# Altium PCB PCB2.PcbDoc
Units mm, origin at the board's own origin, x right, y up, seen from the top; angles counter-clockwise.
Board outline 100 x 50 mm, 2 copper layers (Top Layer, Bottom Layer); 30 components, 21 nets, 98 pads, 11 vias.
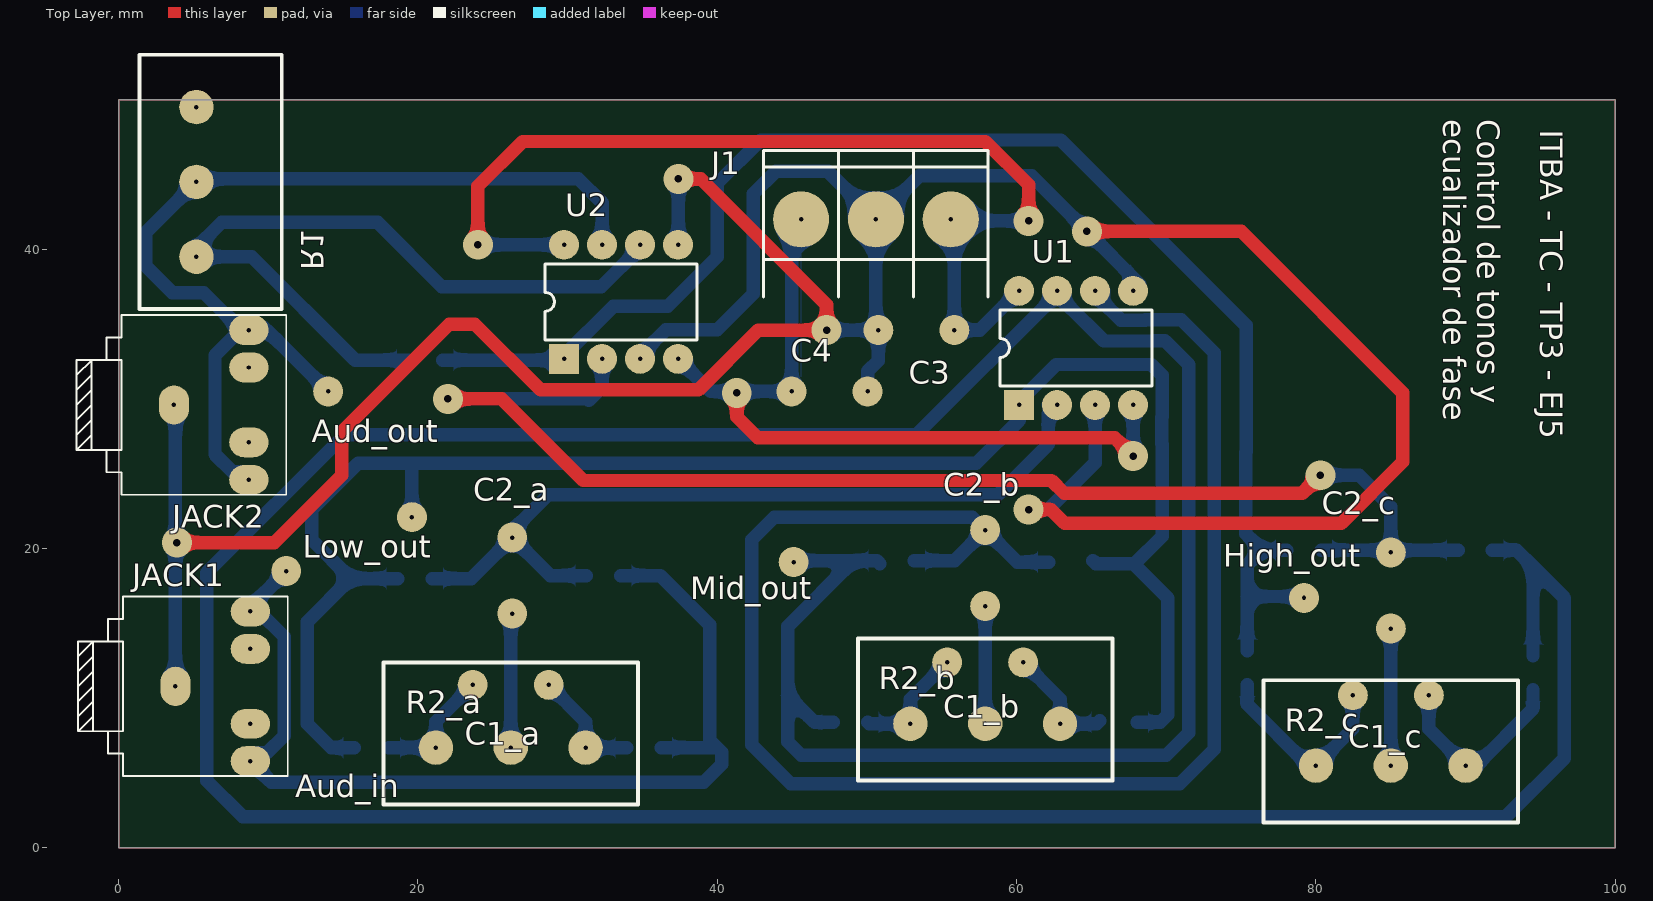
[diagram p0: Top Layer view]
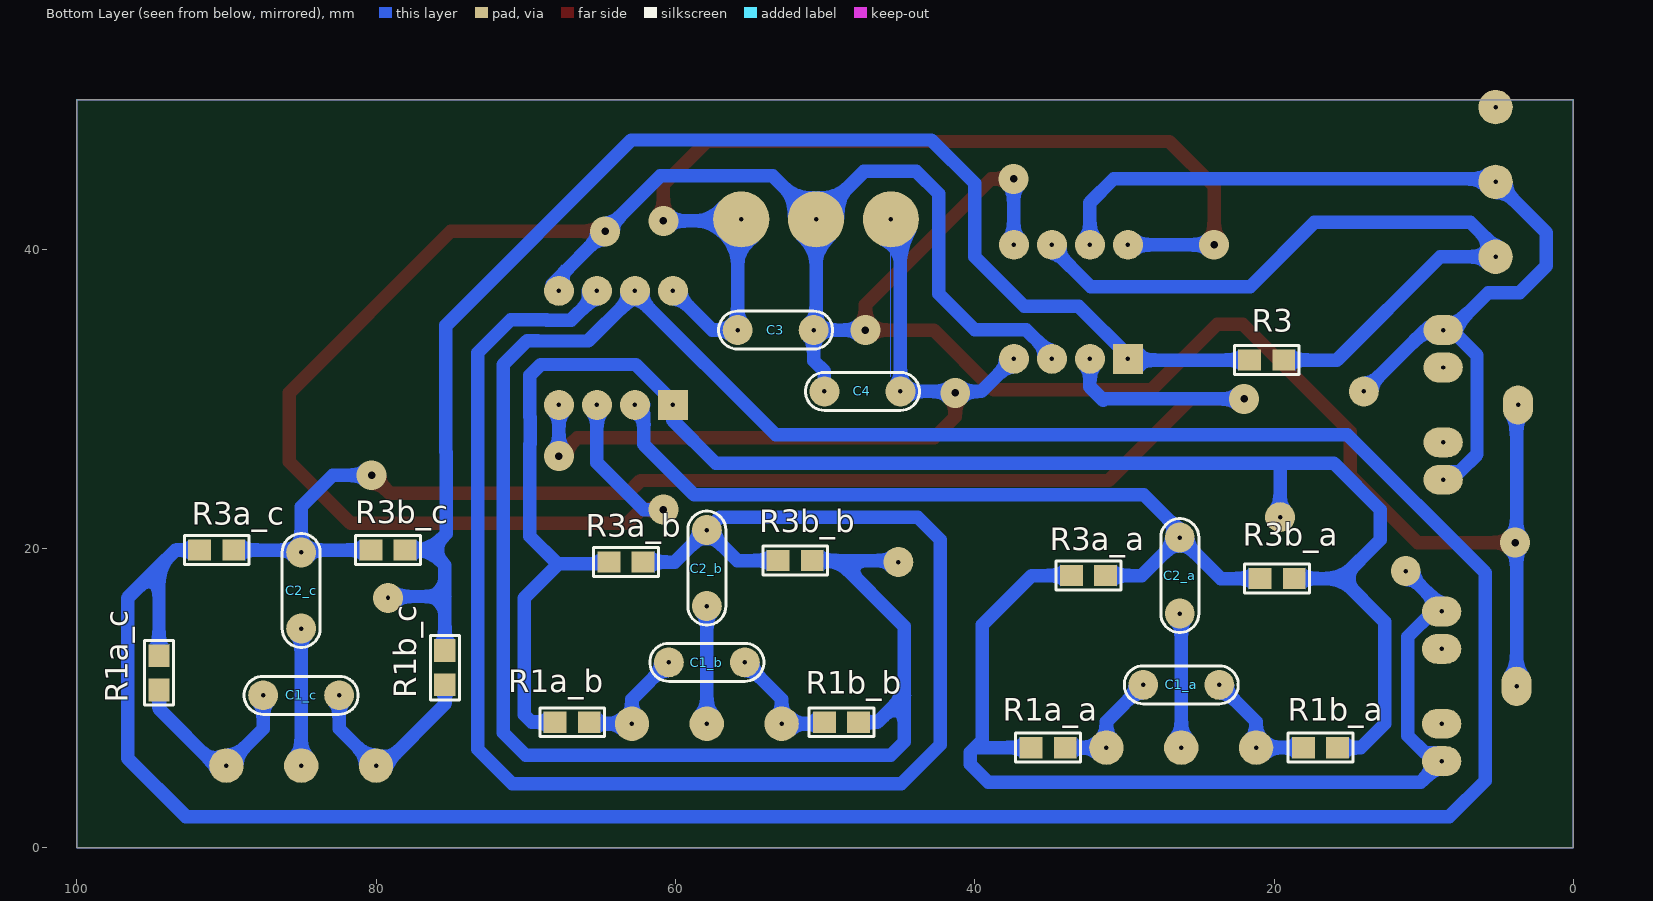
[diagram p1: Bottom Layer view, seen from below]
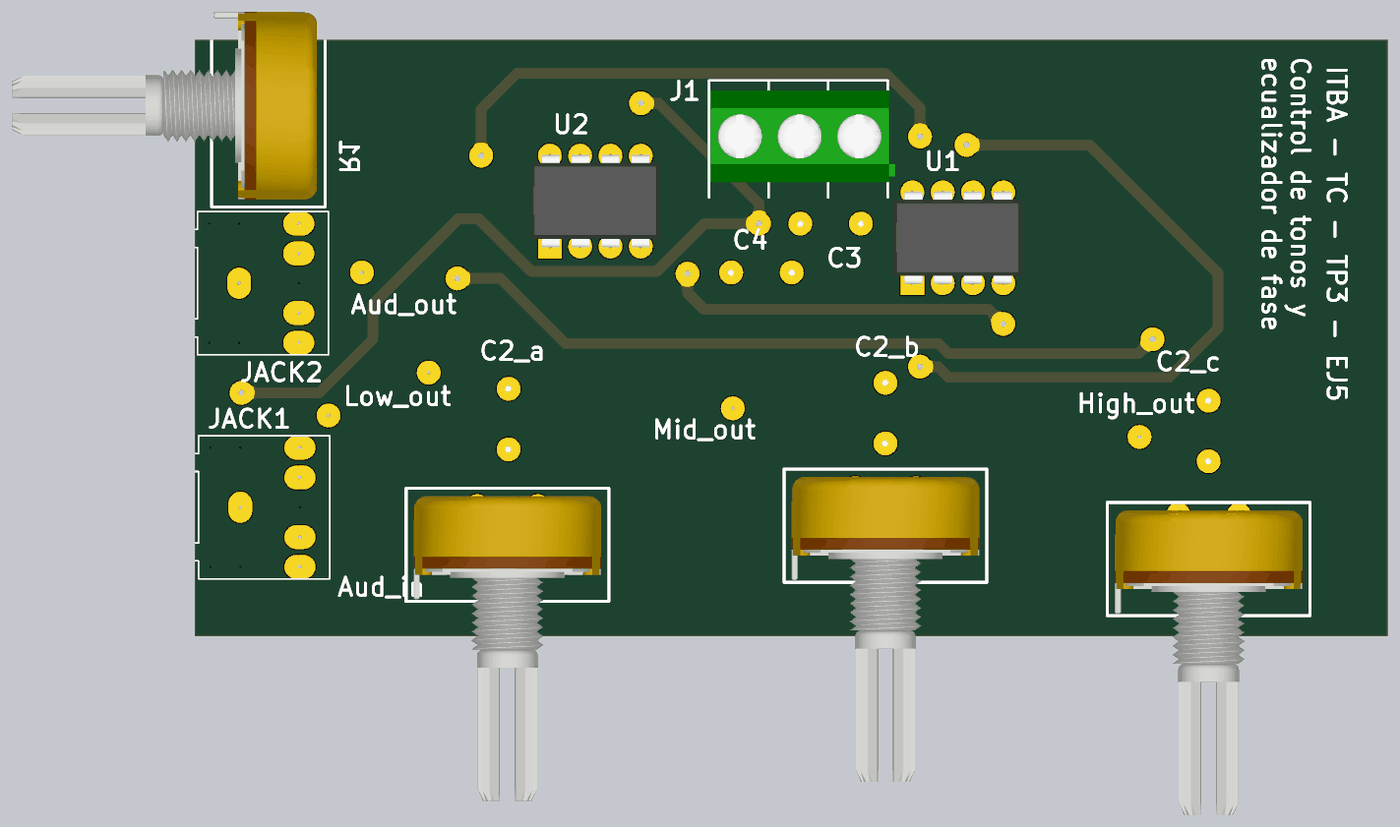
[diagram p2: 3D render of the assembled board from above, using the file's embedded part models]
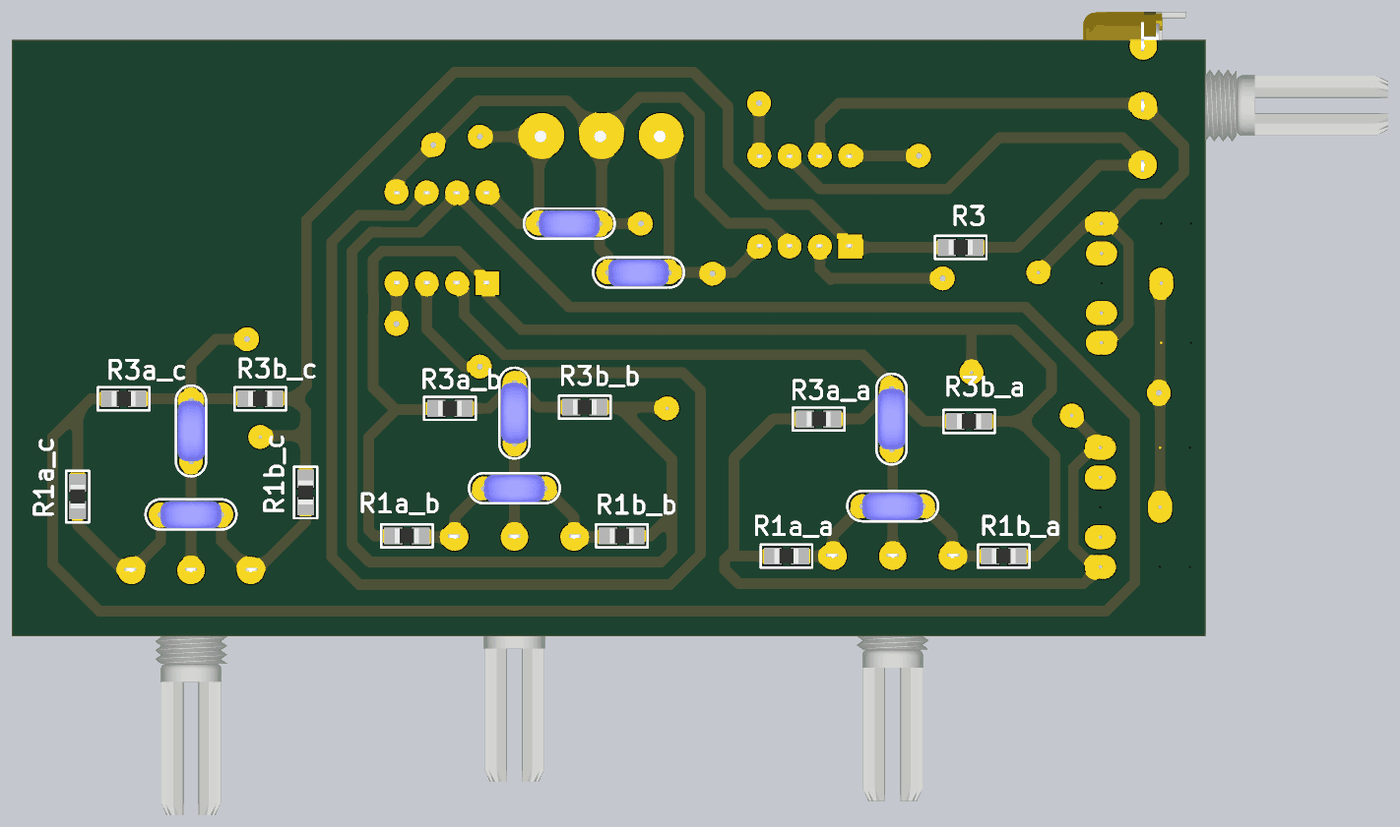
[diagram p3: 3D render of the assembled board from below, using the file's embedded part models]

## Layer stack, top to bottom
Top Solder: solder mask 0.0102, Solder Resist, Dk 3.5
Top Layer: signal copper 0.0356
Dielectric 1: dielectric 0.32, FR-4, Dk 4.8
Bottom Layer: signal copper 0.0356
Bottom Solder: solder mask 0.0102, Solder Resist, Dk 3.5

## Board outline
0,0 100,0 100,50 0,50

## Design rules (kind name [scope] priority, off if disabled: settings)
Clearance [All] p1: gap=0.5 ignorepadtopadclearanceinfootprint=FALSE
PolygonConnect PolygonConnect_5 [All vs IsNamedPolygon('GND_L02_P010')] p1: thpad.connectstyle=Relief thpad.reliefconductorwidth=0.5 thpad.reliefentries=4 thpad.polygonreliefangle="45 Angle" thpad.airgapwidth=0.254 smdpad.connectstyle=Relief smdpad.reliefconductorwidth=0.5 smdpad.reliefentries=4 smdpad.polygonreliefangle="45 Angle" smdpad.airgapwidth=0.254 via.connectstyle=Relief via.reliefconductorwidth=0.254 via.reliefentries=4 via.polygonreliefangle="90 Angle" via.airgapwidth=0.254
PolygonConnect Cond_width_mine [All vs IsNamedPolygon('GND_L02_P010')] p2: thpad.connectstyle=Relief thpad.reliefconductorwidth=0.5 thpad.reliefentries=4 thpad.polygonreliefangle="90 Angle" thpad.airgapwidth=0.254 smdpad.connectstyle=Relief smdpad.reliefconductorwidth=0.5 smdpad.reliefentries=4 smdpad.polygonreliefangle="90 Angle" smdpad.airgapwidth=0.254 via.connectstyle=Relief via.reliefconductorwidth=0.254 via.reliefentries=4 via.polygonreliefangle="90 Angle" via.airgapwidth=0.254
PolygonConnect PolygonConnect_4 [All vs IsNamedPolygon('GND_L02_P010')] p3: connectstyle=Relief reliefconductorwidth=0.5 reliefentries=4 polygonreliefangle="90 Angle" airgapwidth=0.254
PolygonConnect PolygonConnect_3 [All vs IsNamedPolygon('GND_L02_P010')] p4: thpad.connectstyle=Relief thpad.reliefconductorwidth=0.5 thpad.reliefentries=4 thpad.polygonreliefangle="90 Angle" thpad.airgapwidth=0.254 smdpad.connectstyle=Relief smdpad.reliefconductorwidth=0.254 smdpad.reliefentries=4 smdpad.polygonreliefangle="90 Angle" smdpad.airgapwidth=0.254 via.connectstyle=Relief via.reliefconductorwidth=0.254 via.reliefentries=4 via.polygonreliefangle="90 Angle" via.airgapwidth=0.254
PolygonConnect PolygonConnect_2 [All vs IsNamedPolygon('GND_L02_P010')] p5: thpad.connectstyle=Relief thpad.reliefconductorwidth=0.5 thpad.reliefentries=4 thpad.polygonreliefangle="90 Angle" thpad.airgapwidth=0.254 smdpad.connectstyle=Relief smdpad.reliefconductorwidth=0.5 smdpad.reliefentries=4 smdpad.polygonreliefangle="90 Angle" smdpad.airgapwidth=0.254 via.connectstyle=Relief via.reliefconductorwidth=0.254 via.reliefentries=4 via.polygonreliefangle="90 Angle" via.airgapwidth=0.254
PolygonConnect PolygonConnect_1 [All vs IsNamedPolygon('GND_L02_P010')] p6: thpad.connectstyle=Relief thpad.reliefconductorwidth=0.5 thpad.reliefentries=4 thpad.polygonreliefangle="90 Angle" thpad.airgapwidth=0.254 smdpad.connectstyle=Relief smdpad.reliefconductorwidth=0.254 smdpad.reliefentries=4 smdpad.polygonreliefangle="90 Angle" smdpad.airgapwidth=0.254 via.connectstyle=Relief via.reliefconductorwidth=0.254 via.reliefentries=4 via.polygonreliefangle="90 Angle" via.airgapwidth=0.254
PolygonConnect [All] p7: connectstyle=Relief reliefconductorwidth=0.254 reliefentries=4 polygonreliefangle="90 Angle" airgapwidth=0.254
RoutingVias [All] p1: holewidth=0.5 width=2 viastyle="Through Hole" minholewidth=0.3 minwidth=1.5 maxholewidth=0.5 maxwidth=2
SolderMaskExpansion [All] p1: expansion=0.102
Width [All] p1: maxlimit=0.9 minlimit=0.6 preferedwidth=0.9
30 further rules are at their usual default settings.

## Classes and differential pairs
component class U_EQ_C: C1_c C2_c R1a_c R1b_c R2_c R3a_c R3b_c U2
component class U_EQ_B: C1_b R1a_b R1b_b R3a_b R3b_b
component class U_EQ_A: C1_a C2_a R1a_a R1b_a R2_a R3a_a R3b_a U1
component class Top: C3 C4 JACK1 JACK2 R1 R3

## Components (designator, comment, footprint, x,y, rotation, side; value= is the part's Value field where it differs from the comment)
C1_a "47nF" CAP200 26.2,10.9 r180 bottom
C1_b "470nF" CAP200 57.9,12.4 r180 bottom
C1_c "56nF" CAP200 85,10.2 r180 bottom
C2_a "470nF" CAP200 26.3,18.2 r90 bottom
C2_b "47nF" CAP200 57.9,18.7 r90 bottom
C2_c "5.6nF" CAP200 85,17.2 r90 bottom
C3 "100nF" CAP200 53.3,34.6 r180 bottom
C4 "100nF" CAP200 47.5,30.5 r180 bottom
J1 "BORNERA 3" BORNERA3 50.6,42 r270 top
JACK1 "FC68131" *FC68131-5P 8.8,10.8 r0 top
JACK2 "FC68131" *FC68131-5P 8.7,29.6 r0 top
R1 "1K" POTENCIOMETRO 5.2,44.5 r90 top
R1a_a "120R" 0805 35.1,6.7 r180 bottom
R1a_b "120R" 0805 66.9,8.4 r180 bottom
R1a_c "150R" 0805 94.5,11.7 r270 bottom
R1b_a "120R" 0805 16.9,6.7 r180 bottom
R1b_b "120R" 0805 48.9,8.4 r180 bottom
R1b_c "150R" 0805 75.4,12.043 r90 bottom
R2_a "100K" POTENCIOMETRO 26.2,6.7 r0 top
R2_b "1K" POTENCIOMETRO 57.9,8.3 r0 top
R2_c "1K" POTENCIOMETRO 85,5.5 r0 top
R3 "470R" 0805 20.5,32.6 r180 bottom
R3a_a "1M" 0805 32.4,18.2 r180 bottom
R3a_b "10K" 0805 63.3,19.1 r180 bottom
R3a_c "10K" 0805 90.643,19.9 r180 bottom
R3b_a "1M" 0805 19.8,18 r180 bottom
R3b_b "10K" 0805 52,19.2 r180 bottom
R3b_c "10K" 0805 79.2,19.9 r180 bottom
U1 "LM833" DIP8 60.16,29.6 r90 top
U2 "LM833" DIP8 29.76,32.68 r90 top

## Footprints (in the part's own frame and the unit in brackets; to place one, negate y for a bottom-side part, rotate by r counter-clockwise, add the part's x,y. Pads: shape width x height; smd on the part's side, far side on the other; paste and mask are expansions set on the pad)
0805 [mil] "Pasivo 0805"
  rect 60x56 smd: 1(-45,0) 2(45,0)
  silkscreen extent -85,-38 85,38, body extent -40,-25 39,25, height 15
*FC68131-5P [mm]
  oval 2x2.616 hole 0.3: 1(-5,0)
  oval 2.616x2 hole 0.3: 2(0,-5) 3(0,-2.5) 4(0,2.5) 5(0,5)
  round 0 all layers, no hole: None(-7.5,-5) None(-7.5,5) None(-5,-5) None(-5,5) None(0,0)
  silkscreen extent -11.5,-6 2.5,6
BORNERA3 [mm] "Bornera con Tornillos 5mm separación"
  round 3.75 hole 0.3: 1(0,5) 2(0,0) 3(0,-5)
  silkscreen extent -4.6,-7.5 5.2,7.5, body extent -3.76,-7.39 3.94,8.11, height 10.05
CAP200 [mm]
  round 2 hole 0.3: 1(-2.54,0) 2(2.54,0)
  silkscreen extent -3.81,-1.27 3.81,1.27, body extent -2.79,-1.17 2.79,1.12, height 6.24
DIP8 [mm]
  rect 2x2 hole 0.3: 1(0,0)
  round 2 hole 0.3: 2(0,-2.54) 3(0,-5.08) 4(0,-7.62) 5(7.62,-7.62) 6(7.62,-5.08) 7(7.62,-2.54) 8(7.62,0)
  silkscreen extent 1.27,-8.89 6.35,1.27, body extent -0.06,-9.21 7.7,1.59, height 4.5
POTENCIOMETRO [mm]
  round 2.3 hole 0.3: 1(-5,0) 2(0,0) 3(5,0)
  silkscreen extent -8.5,-5.7 8.5,3.8, body extent -7.87,-5.03 7.87,20.53, height 20.14

## Part data
C1_a C1_b C1_c C2_a C2_b C2_c C3 C4: library part CAP
JACK1 JACK2: "Stereo Jack, 3.5mm, 3pos, Pcb", Package=None, Availability=Unavailable, MF=Cliff, MP=FC68131, Price=None, SnapEDA_Link=https://www.snapeda.com/parts/FC68131/Cliff%20Electronics/view-part/?ref=snap
R1 R2_a R2_b R2_c: library part POTENCIOMETRO
R1a_a R1a_b R1a_c R1b_a R1b_b R1b_c R3 R3a_a R3a_b R3a_c R3b_a R3b_b R3b_c: library part RES
U1 U2: "Dual Audio Operational Amplifier"

## Free pads (board coordinates)
  round 2 hole 0.3: 2(14,30.5) 3(11.2,18.5) 4(19.6,22.1) 5(45.1,19.1) 6(79.2,16.7)

## Via types
v1: diameter 2, hole 0.5, Top Layer to Bottom Layer, 11 vias

## Nets (pads, with @x,y where several pads share a name; then routed paths per layer and width w, separated by ;. In a path a pad name is that pad's centre, name@x,y a point inside that pad or via, vN(x,y) a via of type N, cw(c..) or ccw(c..) an arc to the next point about the centre after c; other vN are vias at no path point)
+Vcc: C3.1 J1.1 U1.8 U2.8 | length 69.5
  Top Layer w0.9: v1(24,40.3) 24,44.2 27,47.2 57.9,47.2 60.8,44.3 v1(60.8,41.9) ; J1.1@55.6,41.78 J1.1
  Bottom Layer w0.9: v1(24,40.3) U2.8 ; J1.1 J1.1@55.7,41.9 ; U1.8 57.54,34.6 C3.1 55.84,41.76 J1.1@55.7,41.9 ; v1(60.8,41.9) J1.1@55.7,41.9
-Vcc: C4.2 J1.3 U1.4 U2.4 | length 63.6
  Top Layer w0.9: v1(41.3,30.4) 41.3,28.8 42.7,27.4 66.56,27.4 v1(67.78,26.18) ; U1.4@67.78,29.382 U1.4
  Bottom Layer w0: 45.6,31.48 J1.3
  Bottom Layer w0.9: U2.4 39.56,30.5 C4.2 44.96,41.36 J1.3 ; v1(67.78,26.18) U1.4
Aud_in: JACK1.2 JACK1.5 pad.3 R1a_a.1 R3a_a.1 | length 69.8
  Bottom Layer w0.9: pad.3 8.8,16.1 JACK1.5 9.366,15.8 11.058,14.108 11.058,7.492 9.916,6.35 8.8,6.35 JACK1.2 10.2,4.4 39.1,4.4 40.3,5.6 40.3,6.4 40,6.7 ; R3a_a.1 36.2,18.2 39.5,14.9 39.5,7.2 40,6.7 ; R1a_a.1 40,6.7
Aud_out: JACK2.2 JACK2.5 pad.2 R1.2 U2.7 | length 64.8
  Bottom Layer w0.9: JACK2.5@8.134,34.6 6.442,32.908 6.442,26.292 7.584,25.15 8.15,25.15 JACK2.2 ; JACK2.5@8.2,34.6 5.7,37.1 3.6,37.1 1.8,38.9 1.8,41.1 R1.2 5.4,44.7 30.72,44.7 32.3,43.12 U2.7 ; JACK2.5 9.9,34.6 pad.2
GND: C3.2 C4.1 J1.2 JACK1.1 JACK2.1 U1.3 U1.5 U2.3 U2.5 | length 224.6
  Top Layer w0.9: v1(3.9,20.4) 10.4,20.4 14.9,24.9 14.9,27.8 22.1,35 23.8,35 28.2,30.6 38.742,30.6 42.742,34.6 v1(47.3,34.6) 47.3,36.3 38.9,44.7 v1(37.4,44.7) ; v1(60.8,22.6) 62.3,22.6 63.2,21.7 81.7,21.7 85.8,25.8 85.8,30.4 75,41.2 v1(64.7,41.2)
  Bottom Layer w0.9: v1@3.5,20.8 v1@3.8,20.5 ; JACK2.1 3.8,29.5 v1@3.8,20.5 ; JACK1.1 v1@3.8,20.5 ; v1(3.9,20.4) v1@3.8,20.5 ; U2.3 35.39,33.23 35.43,33.23 35.43,33.488 36.572,34.63 40.008,34.63 42.4,37.022 42.4,43.7 43.9,45.2 47.4,45.2 J1.2 ; U2.5 37.4,40.32 v1(37.4,44.7) ; v1(47.3,34.6) C3.2 ; C4.1 50.04,31.84 50.76,32.56 C3.2 ; v1(60.8,22.6) 62.1,22.6 65.24,25.74 U1.3 ; v1@64.6,41.1 v1(64.7,41.2) ; U1.5 68.23,37.67 v1(64.7,41.2) ; J1.2 53.5,44.9 61,44.9 v1(64.7,41.2) ; J1.2 50.6,34.76 C3.2
NetC1_a_1: C1_a.1 R1a_a.2 R2_a.3 | length 8
  Bottom Layer w0.9: C1_a.1 31.2,8.44 R2_a.3 R1a_a.2
NetC1_a_2: C1_a.2 R1b_a.1 R2_a.1 | length 8.4
  Bottom Layer w0.9: R1b_a.1 R2_a.1 21.2,8.44 C1_a.2
NetC1_b_1: C1_b.1 R1a_b.2 R2_b.3 | length 7.9
  Bottom Layer w0.9: C1_b.1 62.9,9.94 R2_b.3 65.357,8.3 R1a_b.2@65.557,8.5
NetC1_b_2: C1_b.2 R1b_b.1 R2_b.1 | length 8
  Bottom Layer w0.9: R1b_b.1 50.143,8.3 R2_b.1 52.9,9.94 C1_b.2
NetC1_c_1: C1_c.1 R1a_c.2 R2_c.3 | length 13
  Bottom Layer w0.9: C1_c.1 87.54,7.96 R2_c.3 90.7,5.5 94.5,9.3 R1a_c.2
NetC1_c_2: C1_c.2 R1b_c.1 R2_c.1 | length 13.3
  Bottom Layer w0.9: R1b_c.1 75.4,9.6 79.5,5.5 R2_c.1 82.46,7.96 C1_c.2
NetC2_a_1: C2_a.1 R2_a.2 | length 9
  Bottom Layer w0.9: R2_a.2 26.2,15.56 C2_a.1
NetC2_a_2: C2_a.2 R3a_a.2 R3b_a.1 U1.2 | length 54.5
  Bottom Layer w0.9: R3b_a.1 23.56,18 C2_a.2 28.84,18.2 R3a_a.2 ; C2_a.2@26.1,21 28.7,23.6 58.751,23.6 62.11,26.959 62.11,29.01 U1.2 U1.2@62.11,29.6
NetC2_b_1: C2_b.1 R2_b.2 | length 7.9
  Bottom Layer w0.9: R2_b.2 C2_b.1
NetC2_b_2: C2_b.2 R3a_b.2 R3b_b.1 U1.6 | length 110.6
  Bottom Layer w0.9: R3b_b.1 55.86,19.2 C2_b.2 ; R3a_b.2 60.04,19.1 C2_b.2 ; U1.6 65.83,37.22 65.83,36.412 66.972,35.27 68.588,35.27 68.609,35.291 70.989,35.291 73.2,33.08 73.2,6.6 70.9,4.3 44.9,4.3 42.3,6.9 42.3,20.6 43.8,22.1 57.04,22.1 C2_b.2
NetC2_c_1: C2_c.1 R2_c.2 | length 9.2
  Bottom Layer w0.9: R2_c.2 C2_c.1
NetC2_c_2: C2_c.2 R3a_c.2 R3b_c.1 U2.2 | length 91.8
  Top Layer w0.9: v1(22,30) 25.6,30 31.05,24.55 62.33,24.55 63.18,23.7 79.1,23.7 v1(80.3,24.9)
  Bottom Layer w0.9: v1(22,30) 31.3,30 31.4,29.9 32.3,30.8 U2.2 ; v1(80.3,24.9) 82.9,24.9 85,22.8 C2_c.2@85,19.9 ; R3b_c.1 C2_c.2@85,19.9 ; C2_c.2 C2_c.2@85,19.9 ; R3a_c.2 C2_c.2@85,19.9
NetR1_1: R1.1 R3.2 U2.6 | length 51.4
  Bottom Layer w0.9: R1.1@4.8,39.5 R1.1 ; R3.2 15.8,32.6 8.9,39.5 R1.1 ; U2.6 34.84,40.082 32.258,37.5 21.6,37.5 17.3,41.8 6.9,41.8 5.2,40.1 R1.1
NetR1a_b_1: pad.4 R1a_b.1 R1b_a.2 R3a_b.1 R3b_a.2 U1.1 | length 118.5
  Bottom Layer w0.9: R1b_a.2 14.2,6.7 12.6,8.3 12.6,15.1 15.5,18 ; R3b_a.2 15.5,18 ; pad.4 19.6,25.6 19.5,25.7 ; R3a_b.1@65.1,19.2 65.3,19 67.8,19 70.1,16.7 70.1,8.9 69.6,8.4 R1a_b.1 ; 67.9,19 69.73,20.83 69.73,26.988 69.7,27.018 69.7,28.762 69.73,28.792 69.73,31.57 69,32.3 62.642,32.3 60.16,29.818 U1.1 60.16,28.56 57.3,25.7 19.5,25.7 ; 15.5,18 12.9,20.6 12.9,22.6 16,25.7 19.5,25.7
NetR1a_c_1: pad.5 R1a_c.1 R1b_b.2 R3a_c.1 R3b_b.2 U1.7 | length 280.7
  Bottom Layer w0.9: pad.5 45.2,19.2 49.1,19.2 ; R1b_b.2 46.5,8.4 44.7,10.2 ; R3b_b.2@50.857,19 50.657,19.2 49.1,19.2 ; U1.7 62.7,37.002 53.298,27.6 15.1,27.6 5.9,18.4 5.9,4.5 8.3,2.1 92.7,2.1 96.6,6 96.6,16.7 94.5,18.8 ; 63.29,36.412 65.832,33.87 69.168,33.87 69.189,33.891 69.909,33.891 71.5,32.3 71.5,7.7 70,6.2 45.6,6.2 44.7,7.1 44.7,10.2 ; R3a_c.1 93.4,19.9 94.5,18.8 ; R1a_c.1 94.5,18.8 ; 44.7,10.2 44.7,14.8 49.1,19.2
NetR1b_c_2: pad.6 R1b_c.2 R3.1 R3b_c.2 U2.1 | length 96
  Bottom Layer w0.9: R3.1 29.68,32.6 U2.1 29.76,32.898 33.062,36.2 36.7,36.2 40,39.5 40,44.4 42.9,47.3 62.94,47.3 75.33,34.91 75.33,26.473 75.3,26.443 75.3,21 76.4,19.9 ; R1b_c.2 75.4,16.8 ; R3b_c.2 76.4,19.9 ; pad.6 79.1,16.8 75.4,16.8 ; 75.4,16.8 75.4,18.9 76.4,19.9
pads on no net: JACK1.3 JACK1.4 JACK1.None JACK2.3 JACK2.4 JACK2.None R1.3

## Other copper
Multi-Layer:
  the board outline again, w0.1

## Silkscreen, mask and mechanical layers (free items; w line width, h text height)
Top Overlay:
  text "Control de tonos y  / ecualizador de fase" at 88.5,48.7 h1.52 r270
  text "ITBA - TC - TP3 - EJ5" at 95,48 h1.52 r270
  text "Aud_out" at 12.9,27.1 h1.52
  text "Low_out" at 12.3,19.4 h1.52
  text "High_out" at 73.8,18.8 h1.52
  text "Mid_out" at 38.2,16.6 h1.52
  text "Aud_in" at 11.8,3.4 h1.52